# EAGLE board Mighty Blad-Jarv (9) (EAGLE 9.7.0)

Size 392.73 x 265.02 mm. Coordinates in mm from the lower left corner, seen from the top.
Outline: 0,0 392.73,0 392.73,265.02 0,265.02 0,0
Copper layers (1*16): Top 0.035mm / dielectric 1.5mm / Bottom 0.035mm
Design rules "default": minimum track width 6mil, minimum drill 0.35mm, track to track 6mil, track to pad 6mil, pad to pad 6mil, via to via 6mil, smd to smd 6mil, copper to edge 40mil, drill to drill 6mil, minimum pad ring 10mil, minimum via ring 8mil, stop-mask expansion 4mil, vias tented up to drill 0mil, thermal gap 10mil

## Footprints (pad centres in the part's own frame; a part is rotated, then mirrored left to right if it is on the bottom)
MQ-XX-SOCKET = drill 1.27: 1 -6.223,6.223; 2 -8.788,0; 3 -6.223,-6.223; 4 6.223,-6.223; 5 8.788,0; 6 6.223,6.223
PIEZO = drill 1 pad 1.6: 1 -3.5,0; 2 3.5,0
GL5528 = drill 0.8 pad 1.4: 1 -1.702,0; 2 1.702,0
RESAD1016W63L850D250B = drill 0.83 pad 1.43: 1 -5.08,0; 2 5.08,0
HA-06-SM065 = drill 1 pad 1.676: 1 -2.54,-2.54; 2 0,2.54; 3 2.54,-2.54
SG90 = drill 1.016 long: 1 -2.54,0; 2 0,0; 3 2.54,0
ARDUINO-UNO-R3-SHIELD = drill 1.016 pad 1.88: 3.3V 24.13,-2.54; 5V 24.13,0; A0 24.13,12.7; A1 24.13,15.24; A2 24.13,17.78; A3 24.13,20.32; A4 24.13,22.86; A5 24.13,25.4; AREF -24.13,-13.97; D2 -24.13,20.32; D3 -24.13,17.78; D4 -24.13,15.24; D5 -24.13,12.7; D6 -24.13,10.16; D7 -24.13,7.62; D8 -24.13,3.81; D9 -24.13,1.27; D10 -24.13,-1.27; D11 -24.13,-3.81; D12 -24.13,-6.35; D13 -24.13,-8.89; GND@0 24.13,2.54; GND@1 24.13,5.08; GND@2 -24.13,-11.43; IOREF 24.13,-7.62; NC 24.13,-10.16; RES 24.13,-5.08; RX -24.13,25.4; SCL -24.13,-19.05; SDA -24.13,-16.51; TX -24.13,22.86; VIN 24.13,7.62
TO92 = drill 0.813 octagon: 1 -1.27,0; 2 0,1.905; 3 1.27,0
TSOP48 = drill 0.8: 1 -2.54,0; 2 0,0; 3 2.54,0
JHD-162A = drill 1.016 long: 1 -19.05,0; 2 -16.51,0; 3 -13.97,0; 4 -11.43,0; 5 -8.89,0; 6 -6.35,0; 7 -3.81,0; 8 -1.27,0; 9 1.27,0; 10 3.81,0; 11 6.35,0; 12 8.89,0; 13 11.43,0; 14 13.97,0; 15 16.51,0; 16 19.05,0
7SEG-X4-I2C = drill 1.016 long: P$1 -3.81,0; P$2 -1.27,0; P$3 1.27,0; P$4 3.81,0

## Placement (x,y rotation side)
GAS1  GAS-SENSORMQ-XX-SOCKET  [MQ-XX-SOCKET]  89.63,98.41 270 top
PIEZO1  PIEZO  [PIEZO]  119.29,251.44 0 top
R1  PHOTOCELL_GL5528  [GL5528]  162,138.98 0 top
R2  10k  [RESAD1016W63L850D250B]  171.7,130.7 90 top
R3  1k  [RESAD1016W63L850D250B]  112.99,72.84 90 top
R4  1k  [RESAD1016W63L850D250B]  157.55,99.81 90 top
RPOT1  10k  [HA-06-SM065]  356.2,8.26 0 top
SERVO2  SERVOSG90  [SG90]  7.06,185.87 0 top
U1  ARDUINO-UNO-R3-SHIELD  [ARDUINO-UNO-R3-SHIELD]  129.42,170.72 270 top
U2  ARDUINO-UNO-R3-SHIELD  [ARDUINO-UNO-R3-SHIELD]  256.96,148.96 270 top
U3  TMP36GT9Z_TO92  [TO92]  118.33,90.33 0 top
U4  IR-RECEIVERTSOP48  [TSOP48]  342.38,137.93 0 top
U6  LCD-16X2JHD-162A  [JHD-162A]  337.11,87.29 0 top
U10  YELLOW  [7SEG-X4-I2C]  347.72,182.28 0 top

## Library data of the parts
GAS1 PIEZO1 R1-R4 RPOT1 SERVO2 U1-U4 U6 U10 = Tinkercad

## Nets
U1_A0: R1.1 R2.1 R4.2 U1.A0
U1_A1: GAS1.1 GAS1.2 GAS1.3 GAS1.4 GAS1.6 R1.2 R3.1 RPOT1.1 SERVO2.2 U1.5V U1.A1 U2.5V U3.3 U4.3 U6.2 U10.P$1
U1_A2: U1.A2 U3.2
U1_A4: U1.A4 U2.A4 U10.P$3
U1_D8: PIEZO1.1 U1.D8
U1_D9: SERVO2.3 U1.D9
U2_A5: U1.A5 U2.A5 U10.P$4
U2_D2: U2.D2 U4.1
U2_D3: U2.D3 U6.13
U2_D4: U2.D4 U6.12
U2_D5: U2.D5 U6.11
U2_D7: U2.D7 U6.14
U2_D11: U2.D11 U6.6
U2_D12: U2.D12 U6.4
U2_GND: GAS1.5 PIEZO1.2 R2.2 R3.2 R4.1 RPOT1.3 SERVO2.1 U1.GND@0 U1.GND@1 U1.GND@2 U2.GND@0 U2.GND@1 U2.GND@2 U3.1 U4.2 U6.1 U6.5 U10.P$2
U6_VO: RPOT1.2 U6.3

## Tracks (layer width: path | path; a pad name or v marks a point on that pad's centre or on a via)
U1_A0  (3 unrouted)
U1_A1  (15 unrouted)
U1_A2  (1 unrouted)
U1_A4  (2 unrouted)
U1_D8  (1 unrouted)
U1_D9  (1 unrouted)
U2_A5  (2 unrouted)
U2_D2  (1 unrouted)
U2_D3  (1 unrouted)
U2_D4  (1 unrouted)
U2_D5  (1 unrouted)
U2_D7  (1 unrouted)
U2_D11  (1 unrouted)
U2_D12  (1 unrouted)
U2_GND  (17 unrouted)
U6_VO  (1 unrouted)